# EAGLE board InstrDigitizer5 (EAGLE 8.5.2)
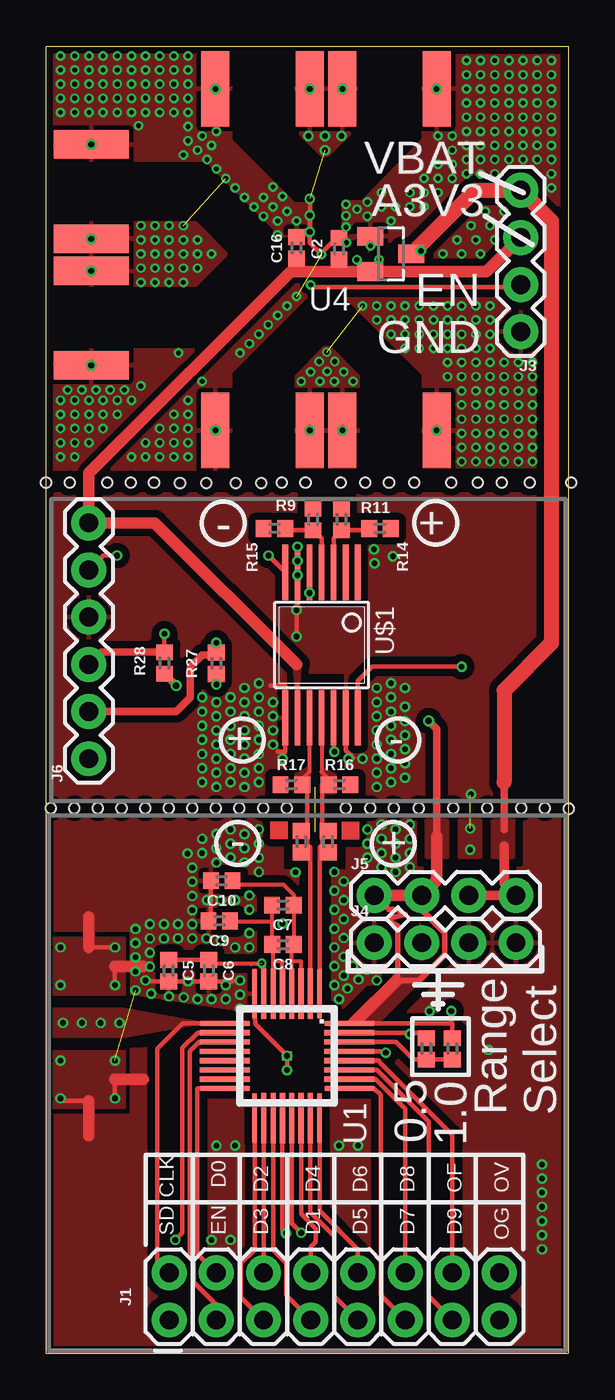
[diagram p0: board, top side]
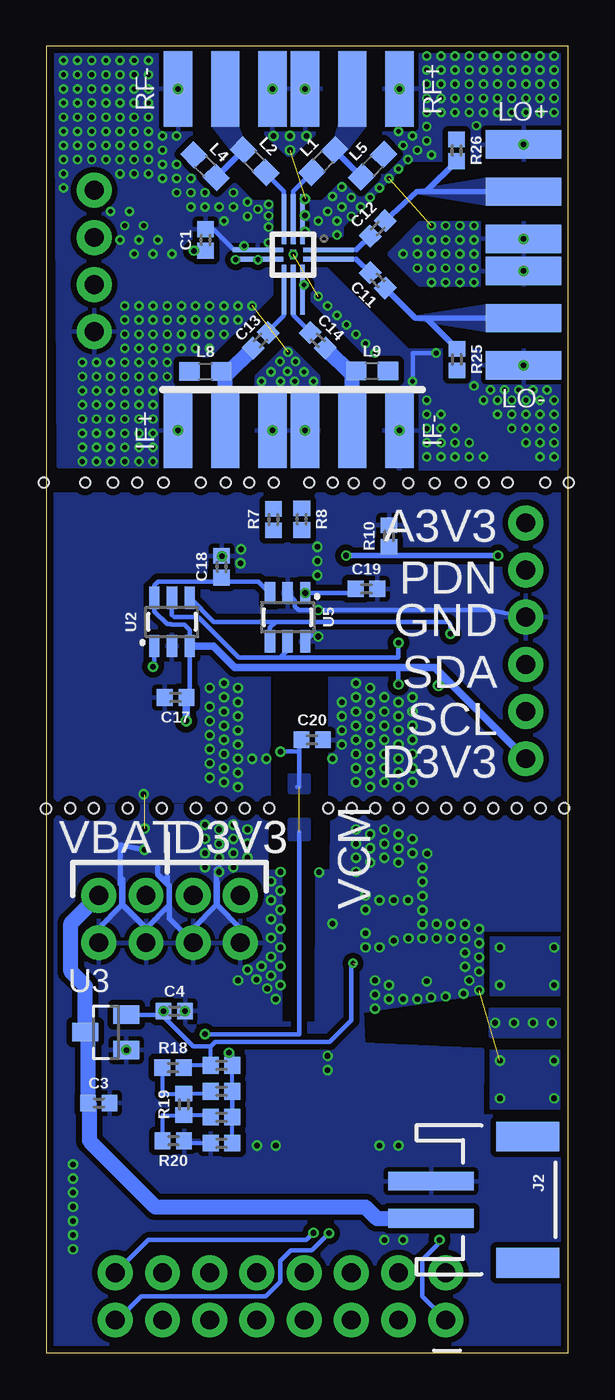
[diagram p1: board, bottom side, seen from below]

Size 28.09 x 70.36 mm. Coordinates in mm from the lower left corner, seen from the top.
Outline: 0,0 28.09,0 28.09,70.36 0,70.36 0,0
Copper layers (1*16): Top 0.0356mm / dielectric 60mil / Bottom 0.0356mm
Design rules "OSHPARK": minimum track width 6mil, minimum drill 10mil, track to track 6mil, track to pad 6mil, pad to pad 6mil, via to via 6mil, smd to smd 0mil, copper to edge 15mil, drill to drill 10mil, minimum pad ring 5mil, minimum via ring 5mil, stop-mask expansion 4mil, vias tented up to drill 20mil, thermal gap 10mil
Holes 0.55 mm at 16.1,29.34 18.69,29.34 12.93,29.34 11.66,29.34 10.39,29.34 9.12,29.34 26.82,29.34 7.85,29.34 6.58,29.34 5.31,29.34 25.55,29.34 23.72,29.34 21.89,29.34 20.04,29.34 28.12,29.31 8.61,46.84 17.42,29.34 4.04,29.34 2.77,29.34 1.5,29.34 0.23,29.34 15.85,46.86 18.44,46.86 13.94,46.86 11.56,46.84 10.19,46.84 5.79,46.86 4.55,46.86 3.28,46.86 24.51,46.86 23.22,46.86 21.79,46.86 19.79,46.86 26.01,46.86 17.17,46.86 7.19,46.84 1.24,46.86 -0.03,46.86 28.24,46.86 12.67,46.86

## Footprints (pad centres in the part's own frame; a part is rotated, then mirrored left to right if it is on the bottom)
0402 = smd 0.85 x 0.9: 1 -0.58,0; 2 0.58,0
CONSMA003.062 = smd 4.06 x 1.52: ANT 0,0; GND1 0,2.54; GND2 0,-2.54 | smd 4.06 x 1.52 bottom: GND3 0,2.54; GND4 0,-2.54
2X8 = drill 1.016 pad 1.88: 1 0,0; 2 0,2.54; 3 2.54,0; 4 2.54,2.54; 5 5.08,0; 6 5.08,2.54; 7 7.62,0; 8 7.62,2.54; 9 10.16,0; 10 10.16,2.54; 11 12.7,0; 12 12.7,2.54; 13 15.24,0; 14 15.24,2.54; 15 17.78,0; 16 17.78,2.54
JST-2-SMD = smd 1 x 4.6: 1 -1,-3.7; 2 1,-3.7 | smd 1.6 x 3.4: NC1 -3.4,1.5; NC2 3.4,1.5
1X04 = drill 1.016 pad 1.88: 1 0,0; 2 2.54,0; 3 5.08,0; 4 7.62,0
1X06 = drill 1.016 pad 1.88: 1 0,0; 2 2.54,0; 3 5.08,0; 4 7.62,0; 5 10.16,0; 6 12.7,0
0603 = smd 1.1 x 1: 1 -0.85,0; 2 0.85,0
HVQFN32_LONG = smd 2.7 x 0.28: 1 -3.35,1.75; 2 -3.35,1.25; 3 -3.35,0.75; 4 -3.35,0.25; 5 -3.35,-0.25; 6 -3.35,-0.75; 7 -3.35,-1.25; 8 -3.35,-1.75; 17 3.35,-1.75; 18 3.35,-1.25; 19 3.35,-0.75; 20 3.35,-0.25; 21 3.35,0.25; 22 3.35,0.75; 23 3.35,1.25; 24 3.35,1.75 | smd 0.28 x 2.7: 9 -1.75,-3.35; 10 -1.25,-3.35; 11 -0.75,-3.35; 12 -0.25,-3.35; 13 0.25,-3.35; 14 0.75,-3.35; 15 1.25,-3.35; 16 1.75,-3.35; 25 1.75,3.35; 26 1.25,3.35; 27 0.75,3.35; 28 0.25,3.35; 29 -0.25,3.35; 30 -0.75,3.35; 31 -1.25,3.35; 32 -1.75,3.35 | smd 0.5 x 0.5: EXP 0,0 | smd 0.25 x 0.25: M1 -2.415,2.415
SOT23-6 = smd 0.55 x 1.2: 1 0.95,1.3; 2 0,1.3; 3 -0.95,1.3; 4 -0.95,-1.3; 5 0,-1.3; 6 0.95,-1.3
SOT23 = smd 1 x 1.4: 1 -0.95,-1.1; 2 0.95,-1.1; 3 0,1.1
TSSOP14_LONG = smd 0.305 x 3: 1 -1.95,-3.918; 2 -1.3,-3.918; 3 -0.65,-3.918; 4 0,-3.918; 5 0.65,-3.918; 6 1.3,-3.918; 7 1.95,-3.918; 8 1.95,3.918; 9 1.3,3.918; 10 0.65,3.918; 11 0,3.918; 12 -0.65,3.918; 13 -1.3,3.918; 14 -1.95,3.918
QFN_10_2X2MM_05-08-1534_LONG = smd 0.25 x 2.7: P$1 -0.25,1.9; P$2 0.25,1.9; P$6 0.25,-1.9; P$7 -0.25,-1.9 | smd 2.7 x 0.25: P$3 1.9,0.5; P$4 1.9,0; P$5 1.9,-0.5; P$8 -1.9,-0.5; P$9 -1.9,0; P$10 -1.9,0.5 | smd 0.5 x 0.3: P$11 0,0

## Placement (x,y rotation side)
C1  1.0uF  [0402]  19.52,59.94 90 bottom
C2  1.0uF  [0402]  15.75,59.46 90 top
C3  1.0uF  [0402]  25.27,13.46 0 bottom
C4  1.0uF  [0402]  21.21,18.41 0 bottom
C5  1.0uF  [0402]  6.58,20.6 270 top
C6  1.0uF  [0402]  8.74,20.6 270 top
C7  1.0uF  [0402]  12.73,24.12 180 top
C8  1.0uF  [0402]  12.73,22 180 top
C9  1.0uF  [0402]  9.3,23.27 180 top
C10  1.0uF  [0402]  9.43,25.43 180 top
C11  1.0uF  [0402]  10.26,57.76 135 bottom
C12  1.0uF  [0402]  10.26,60.55 45 bottom
C13  1.0uF  [0402]  16.56,54.53 225 bottom
C14  1.0uF  [0402]  13.49,54.53 315 bottom
C16  1.0uF  [0402]  13.46,59.51 270 top
C17  1.0uF  [0402]  21.14,35.31 180 bottom
C18  0.1uF  [0402]  18.67,42.35 90 bottom
C19  1.0uF  [0402]  10.87,41.15 0 bottom
C20  1.0uF  [0402]  13.79,33.02 0 bottom
IF+  LINX-SMA-EDGE-0.062  [CONSMA003.062]  18.47,49.68 90 bottom
IF-  LINX-SMA-EDGE-0.062  [CONSMA003.062]  11.63,49.68 270 bottom
J1  [2X8]  6.6,1.78 0 top
J2  [JST-2-SMD]  3.68,8.26 270 bottom
J3  [1X04]  25.53,54.99 90 top
J4  [1X04]  17.65,22.1 0 top
J5  [1X04]  17.65,24.64 0 top
J6  [1X06]  2.29,32 90 top
L1  33nH/±5%/500mA  [0603]  13.19,64.19 45 bottom
L2  33nH/±5%/500mA  [0603]  16.89,64.17 135 bottom
L4  33nH/±5%/500mA  [0603]  19.56,63.91 315 bottom
L5  33nH/±5%/500mA  [0603]  10.54,63.93 225 bottom
L8  33nH/±5%/500mA  [0603]  19.53,52.86 0 bottom
L9  33nH/±5%/500mA  [0603]  10.57,52.88 0 bottom
LO+  LINX-SMA-EDGE-0.062  [CONSMA003.062]  2.41,62.53 0 bottom
LO-  LINX-SMA-EDGE-0.062  [CONSMA003.062]  2.41,55.73 180 bottom
R1  0  [0402]  18.67,15.49 180 bottom
R2  0  [0402]  18.67,14.1 180 bottom
R3  [0402]  15.16,27.53 270 top
R4  [0402]  13.72,27.53 90 top
R5  0  [0402]  18.67,12.7 180 bottom
R6  0  [0402]  18.67,11.3 180 bottom
R7  [0402]  15.88,44.88 270 bottom
R8  [0402]  14.35,44.9 270 bottom
R9  [0402]  14.35,44.89 90 top
R10  [0402]  9.65,44 90 bottom
R11  [0402]  15.88,44.89 90 top
R12  [0402]  21.84,16.38 90 top
R13  [0402]  20.45,16.38 270 top
R14  [0402]  17.96,44.4 0 top
R15  [0402]  12.27,44.4 180 top
R16  [0402]  15.77,30.61 0 top
R17  [0402]  13.18,30.61 0 top
R18  [0402]  21.28,15.37 0 bottom
R19  [0402]  20.7,13.39 90 bottom
R20  [0402]  21.26,11.43 180 bottom
R25  [0402]  5.99,53.5 90 bottom
R26  [0402]  6.02,64.77 270 bottom
R27  [0402]  9.14,37.14 90 top
R28  [0402]  6.35,37.16 270 top
RF+  LINX-SMA-EDGE-0.062  [CONSMA003.062]  11.63,68.07 270 bottom
RF-  LINX-SMA-EDGE-0.062  [CONSMA003.062]  18.47,68.07 90 bottom
U1  LTC2251HVQFN32_L  [HVQFN32_LONG]  12.95,16 270 top
U2  MCP4725  [SOT23-6]  21.34,39.37 180 bottom
U3  MCP1703CB  [SOT23]  24.89,17.27 90 bottom
U4  MCP1703CB  [SOT23]  18.54,59.18 270 top
U5  MCP4725  [SOT23-6]  15.11,39.62 0 bottom
U$1  THS7530TSSOP14_LONG  [TSSOP14_LONG]  14.81,38.13 180 top
U$3  LTC5562LONG  [QFN_10_2X2MM_05-08-1534_LONG]  14.81,59.16 270 bottom

## Library data of the parts
C1-C14 C16 C17 C19 C20 = SparkFun-Capacitors; PROD_ID: CAP-12417
C18 = SparkFun-Capacitors; PROD_ID: CAP-12416
IF+ IF- LO+ LO- RF+ RF- = connector; DIGIKEY: CONSMA003.062-ND
J1 = SparkFun-Connectors
J2 = SparkFun-Connectors; PROD_ID: CONN-11443; SF_ID: PRT-08612
J3-J5 = SparkFun-Connectors; PROD_ID: CONN-09696
J6 = SparkFun-Connectors; PROD_ID: CONN-08437
L1 L2 L4 L5 L8 L9 = SparkFun-Coils; PROD_ID: NDUC-07874
R1-R20 R25-R28 = SparkFun-Resistors
U1 U$1 U$3 = components
U2 U5 = SparkFun-IC-Conversion; PROD_ID: IC-08886
U3 U4 = linear

## Nets
A3V3: C2.1 C16.2 J3.3 J6.6 U4.2 U$1.9 U$3.P$6
A_PDN: J6.5 R10.1 U$1.7
AD_SNS: R12.1 R13.2 U1.30
ADC+: R3.1 R3.2 R16.1 U1.1 U$1.11
ADC-: R4.1 R4.2 R17.2 U1.2 U$1.10
ADC_MODE: R1.1 R2.1 R5.1 R6.1 U1.29
ADC_SHDN: J1.1 U1.10
AGND: C1.2 C2.2 C16.1 IF+.GND1 IF+.GND2 IF+.GND3 IF+.GND4 IF-.GND1 IF-.GND2 IF-.GND3 IF-.GND4 J3.1 LO+.GND1 LO+.GND2 LO+.GND3 LO+.GND4 LO-.GND1 LO-.GND2 LO-.GND3 LO-.GND4 RF+.GND1 RF+.GND2 RF+.GND3 RF+.GND4 RF-.GND1 RF-.GND2 RF-.GND3 RF-.GND4 U4.1 U$3.P$7 U$3.P$10 U$3.P$11
AMP+: R7.1 R11.2
AMP-: R8.1 R9.2
D0: J1.4 U1.16
D1: J1.5 U1.17
D2: J1.6 U1.18
D3: J1.7 U1.19
D3V3: C4.1 C5.1 C6.1 C17.1 C18.1 J5.1 J5.2 J6.1 R1.2 R12.2 R18.2 R27.1 R28.2 U1.7 U1.32 U2.3 U2.6 U3.2 U5.3
D4: J1.8 U1.22
D5: J1.9 U1.23
D6: J1.10 U1.24
D7: J1.11 U1.25
D8: J1.12 U1.26
D9: J1.13 U1.27
GND: C3.2 C4.2 C5.2 C6.2 C9.2 C10.2 C17.2 C18.2 C19.2 C20.2 J2.1 J4.1 J4.2 J4.3 J4.4 J6.4 R6.2 R10.2 R20.1 U1.8 U1.EXP U2.2 U3.1 U5.2 U5.6 U$1.6 U$1.8 U$1.13
IN+: L1.2 L5.2 RF+.ANT
IN-: L2.2 L4.2 RF-.ANT
LO+: C12.2 LO+.ANT R26.2
LO-: C11.1 LO-.ANT R25.2
MIX_EN: J3.2 U$3.P$3
N98: L1.1 U$3.P$9
N$1: R11.1 R14.1 U$1.3
N$11: R9.1 R15.1 U$1.4
N$20: C11.2 U$3.P$2
N$21: C7.1 C8.1 C10.1 U1.3 U1.4
N$22: R5.2 R19.1 R20.2
N$23: C7.2 C8.2 C9.1 U1.5 U1.6
N$24: C12.1 U$3.P$1
N$25: L2.1 U$3.P$8
N$26: C14.1 U$3.P$4
N$27: C13.1 U$3.P$5
N$30: R2.2 R18.1 R19.2
N$37: L8.1
N$38: L9.2
OEN: J1.3 U1.11
OF: J1.14 U1.28
OUT+: C13.2 IF+.ANT L8.2
OUT-: C14.2 IF-.ANT L9.1
OVDD: J1.16 U1.21
OVSS: J1.15 U1.20
SCL: J6.2 R27.2 U2.5 U5.5
SDA: J6.3 R28.1 U2.4 U5.4
SMP_CLK: J1.2 U1.9
VBAT: C1.1 C3.1 J2.2 J3.4 J5.3 J5.4 U3.3 U4.3
VC_CTRL: U2.1 U$1.14
VCM: C20.1 R13.1 U1.31 U$1.12
VGC: C19.1 U5.1 U$1.5

## Tracks (layer width: path | path; a pad name or v marks a point on that pad's centre or on a via)
A3V3  (via drill 0.25)
  Top 0.254: 13.51,35.97 13.51,35.9 U$1.9 | C16.2 13.15,58.61 13.15,58.23 | v17.91,58.88 17.44,58.41 | 17.44,58.41 U4.2 | v16.71,58.87 17.17,58.41 17.44,58.41 | 15.75,58.23 15.75,58.24 C2.1
  Top 0.61: J3.3 23.68,58.23 18.75,58.23 U4.2 15.75,58.23 13.15,58.23 2.29,47.37 J6.6 5.84,44.7 13.46,37.08
  Bottom 0.254: v16.71,58.87 U$3.P$6 17.88,58.91 v17.91,58.88
  pour Top (no thermals): 13.46,37.08 13.34,36.96 13.34,36.93 13.51,35.13 13.67,37.06
A_PDN  (via drill 0.3)
  Top 0.254: U$1.7 v11.96,42.94 | v3.79,42.94 3.06,42.94 J6.5
  Bottom 0.305: v11.96,42.94 9.65,42.94 | 9.65,42.94 v3.79,42.94 | R10.1 9.65,42.94
AD_SNS
  Top 0.254: U1.30 18.81,16.75 19.76,15.8 R13.2 R12.1
ADC+
  Top 0.203: U$1.11 14.81,31.29 15.24,30.86 | 15.24,28.19 R3.1
  Top 0.254: U1.1 14.7,27.26 R3.2 14.83,26.95 14.83,28.11 | R3.1 14.83,28.11 | 14.83,28.11 14.83,30.61 R16.1
  pour Top (no thermals): 14.81,30.23 15.52,30.23 15.52,31.11 14.81,31.5
ADC-
  Top 0.203: U$1.10 14.16,31.3 13.72,30.86
  Top 0.254: U1.2 14.2,27.25 R4.1 14.05,26.95 14.05,28.11 | R4.2 14.05,28.11 | R17.2 14.05,30.61 14.05,28.11
  pour Top (no thermals): 13.44,30.25 14.15,30.25 14.15,31.52 13.44,31.14
ADC_MODE  (via drill 0.3)
  Top 0.254: U1.29 18,16.25 v18.26,16.17
  Bottom 0.203: R2.1 R1.1 | R6.1 R5.1
  Bottom 0.254: v18.26,16.17 18.09,16.16 R1.1 | R2.1 R5.1
ADC_SHDN  (via drill 0.3)
  Top 0.254: v6.93,6.1 7.32,6.48 7.32,16.42 8.14,17.25 U1.10
  Bottom 0.254: v6.93,6.1 6.93,5.97 7.87,5.03 7.87,3.05 J1.1
AGND  (via drill 0.25, 0.3)  (4 unrouted)
  Top 0.203: v14.17,62.15 v14.17,61.27
  Top 0.254: IF-.GND3 9.4,49.38 | IF-.GND4 14.73,49.12 | v16.14,59.79 15.75,59.8 C2.2 15.59,60.04 14.76,59.21 | C16.1 13.75,60.38 v14.17,60.38 | v14.17,60.38 v14.17,61.27 | v14.17,60.38 14.17,59.79 14.76,59.21 | U$3.P$11 14.76,59.21 | U4.1 17.44,59.62 v17.45,59.61
  Bottom 0.203: U$3.P$10 14.17,61.06 v14.17,61.27
  Bottom 0.254: v8.38,52.32 8.38,53.85 v7.11,53.85 | U$3.P$7 16.15,59.41 v16.14,59.79 | C1.2 19.12,60.52 18.03,59.44 17.63,59.44 v17.45,59.61
  other vias: 1.52,48.26 0.76,48.26 2.29,49.02 2.29,49.78 2.29,50.55 1.52,50.55 1.52,49.78 1.52,49.02 0.76,50.55 0.76,49.78 0.76,49.02 4.57,48.26 1.14,51.87 1.91,51.87 3.81,50.55 3.05,50.55 3.05,49.78 2.29,51.31 1.52,51.31 0.76,51.31 5.33,48.26 6.1,48.26 6.86,48.26 2.41,53.19 9.09,49.68 2.67,51.87 3.43,51.87 4.19,51.87 4.57,51.31 3.81,51.31 3.05,51.31 6.1,49.78 6.86,50.55 6.86,49.78 6.86,49.02 6.1,49.02 5.33,49.02 7.62,48.26 5.08,52.07 7.62,49.02 7.62,49.78 7.62,50.55 7.62,51.31 10.41,53.85 10.92,54.36 11.43,54.86 11.94,55.37 12.45,55.88 2.41,58.27 2.41,59.99 6.6,57.66 7.37,57.66 7.37,58.42 6.6,58.42 5.84,57.66 5.84,58.42 5.08,57.66 5.08,58.42 9.65,63.25 7.37,60.71 8.13,58.42 5.84,59.94 5.08,59.94 7.37,59.94 6.6,59.94 7.37,59.18 6.6,59.18 5.84,59.18 5.08,59.18 6.6,60.71 5.84,60.71 5.08,60.71 2.41,65.07 8.89,59.18 8.13,59.18 8.13,59.94 4.95,66.09 2.29,68.33 2.29,67.56 2.29,66.8 1.52,68.33 1.52,67.56 1.52,66.8 0.76,68.33 0.76,67.56 0.76,66.8 14.17,49.68 14.68,53.39 15.11,52.86 14.22,52.83 14.73,52.32 13.72,52.32 15.93,49.68 21.01,49.68 17.02,56.39 15.09,53.9 15.52,53.39 16,52.83 16.51,52.32 15.49,52.32 22.35,48.01 14.99,64.77 14.81,59.16 13.46,56.9 12.95,56.39 24.64,48.01 23.88,48.01 23.11,48.01 22.35,49.53 22.35,48.77 22.35,51.05 22.35,50.29 7.37,64.52 4.57,68.33 4.57,67.56 4.57,66.8 3.81,68.33 3.81,67.56 3.81,66.8 3.05,68.33 3.05,67.56 3.05,66.8 2.29,69.85 2.29,69.09 1.52,69.85 1.52,69.09 0.76,69.85 0.76,69.09 12.45,60.2 12.45,60.96 11.68,61.21 9.14,63.75 13.46,60.96 19.3,54.1 18.54,54.86 19.3,54.86 17.78,55.63 18.54,55.63 19.3,55.63 21.59,52.58 21.59,53.34 20.07,55.63 20.07,54.86 20.07,54.1 26.16,48.01 25.4,48.01 24.64,49.53 24.64,48.77 23.88,49.53 23.88,48.77 23.11,49.53 23.11,48.77 24.64,51.05 24.64,50.29 23.88,51.05 23.88,50.29 23.11,51.05 23.11,50.29 22.35,53.34 22.35,52.58 22.35,51.82 12.19,62.79 6.86,68.33 6.86,67.56 6.86,66.8 6.1,68.33 6.1,67.56 6.1,66.8 5.33,68.33 5.33,67.56 5.33,66.8 4.57,69.85 4.57,69.09 3.81,69.85 3.81,69.09 3.05,69.85 3.05,69.09 7.62,66.04 9.14,65.79 8.38,65.53 8.89,65.02 8.13,64.77 8.64,64.26 11.18,61.72 10.16,62.74 10.67,62.23 11.68,62.23 12.19,61.72 7.62,65.28 17.78,56.39 18.54,56.39 19.3,56.39 22.35,55.63 21.59,55.63 20.83,55.63 20.07,56.39 22.35,54.86 22.35,54.1 21.59,54.86 21.59,54.1 20.83,54.86 20.83,54.1 26.16,49.53 26.16,48.77 25.4,49.53 25.4,48.77 26.16,51.05 26.16,50.29 25.4,51.05 25.4,50.29 24.64,53.34 24.64,52.58 24.64,51.82 23.88,53.34 23.88,52.58 23.88,51.82 23.11,53.34 23.11,52.58 23.11,51.82 16.13,61.24 16.13,60.63 17.27,61.21 12.7,62.28 6.86,69.85 6.86,69.09 6.1,69.85 6.1,69.09 5.33,69.85 5.33,69.09 7.62,68.33 7.62,67.56 7.62,66.8 12.95,61.47 9.09,68.07 14.99,65.53 23.88,55.63 23.11,55.63 22.35,56.39 21.59,56.39 20.83,56.39 23.88,54.86 23.88,54.1 23.11,54.86 23.11,54.1 26.16,53.34 26.16,52.58 26.16,51.82 25.4,53.34 25.4,52.58 25.4,51.82 16.71,61.59 16.13,61.85 17.27,61.98 18.54,60.96 7.62,69.85 7.62,69.09 14.1,65.53 22.35,59.18 22.1,59.94 21.34,59.18 23.88,56.39 23.11,56.39 18.03,62.48 18.03,61.72 18.8,61.72 19.56,61.72 19.56,62.48 14.17,68.07 15.88,65.53 24.13,59.94 23.37,59.18 23.88,60.71 23.11,59.94 22.86,60.71 20.32,61.72 20.32,62.48 20.32,63.25 21.84,63.25 21.08,63.25 21.08,62.48 22.61,63.5 15.93,68.07 24.64,61.47 23.62,61.47 21.84,65.53 21.84,64.77 21.84,64.01 21.08,65.53 21.08,64.01 24.13,63.5 23.37,63.5 22.61,65.79 22.61,65.02 22.61,64.26 27.18,62.74 27.18,63.5 24.89,65.79 24.89,65.02 24.89,64.26 24.13,65.79 24.13,65.02 24.13,64.26 23.37,65.79 23.37,65.02 23.37,64.26 22.61,68.83 22.61,68.07 22.61,67.31 22.61,66.55 21.01,68.07 27.18,65.79 27.18,65.02 27.18,64.26 26.42,65.79 26.42,65.02 26.42,64.26 25.65,65.79 25.65,65.02 25.65,64.26 24.89,68.83 24.89,68.07 24.89,67.31 24.89,66.55 24.13,68.83 24.13,68.07 24.13,67.31 24.13,66.55 23.37,68.83 23.37,68.07 23.37,67.31 23.37,66.55 22.61,69.6 27.18,68.83 27.18,68.07 27.18,67.31 27.18,66.55 26.42,68.83 26.42,68.07 26.42,67.31 26.42,66.55 25.65,68.83 25.65,68.07 25.65,67.31 25.65,66.55 24.89,69.6 24.13,69.6 23.37,69.6 27.18,69.6 26.42,69.6 25.65,69.6
  pour Bottom (isolate 0.305): 0.51,47.75 0.51,53.98 8.64,53.98 13.08,58.42 14.1,58.42 14.1,57.02 9.91,52.83 9.91,47.62 0.64,47.62
  pour Top (isolate 0.305): 0.38,53.98 0.38,47.62 9.91,47.62 9.91,52.83 13.97,56.9 13.97,58.04 12.32,58.04 8.26,53.98
  pour Bottom (isolate 0.305): 20.32,69.98 20.32,65.3 17.53,62.48 17.02,61.98 16,61.98 16,57.02 20.32,52.7 20.32,47.75 27.43,47.75 27.56,69.98
  pour Top (isolate 0.406): 20.32,69.98 20.32,65.33 17.02,61.98 16,61.98 16,57.02 20.32,52.7 20.32,47.75 27.56,47.75 27.56,69.98
  pour Top (isolate 0.305, rank 2): 13.46,47.75 16.76,47.75 16.76,52.58 15.24,54.1 14.99,54.1 13.46,52.58
  pour Bottom (isolate 0.305, rank 2): 16.76,47.75 13.46,47.75 13.46,52.58 14.99,54.1 15.24,54.1 16.76,52.58
  pour Bottom (isolate 0.406): 0.38,57.53 8,57.53 9.65,59.18 8,60.83 0.38,60.83
  pour Top (isolate 0.406): 0.38,60.83 8,60.83 9.65,59.18 8,57.53 0.38,57.53
  pour Bottom (isolate 0.406): 16.51,70.1 16.51,65.91 15.11,64.52 14.86,64.52 13.34,66.04 13.34,70.1
  pour Top (isolate 0.406): 13.46,70.1 13.46,65.91 14.86,64.52 15.11,64.52 16.64,66.04 16.64,70.1
  pour Bottom (isolate 0.305): 0.51,70.1 0.51,64.26 8.64,64.26 12.19,60.71 12.19,60.2 14.22,60.2 14.22,61.98 13.21,61.98 9.91,65.28 9.91,70.1
  pour Bottom (isolate 0.406): 0.51,70.1 0.51,64.26 8.64,64.26 12.19,60.71 12.19,60.2 14.22,60.2 14.22,61.98 13.21,61.98 9.91,65.28 9.91,70.1
  pour Top (isolate 0.305): 0.38,64.26 0.38,70.1 9.91,70.1 9.91,65.28 13.34,61.85 14.22,61.85 14.22,60.2 12.32,60.2 12.32,60.58 8.64,64.26
AMP+  (1 unrouted)
AMP-  (1 unrouted)
D0
  Top 0.254: U1.16 8.16,14.25 8.13,14.22 8.13,5.33 J1.4
D1
  Top 0.254: U1.17 11.2,5.56 10.46,4.82 10.46,3 J1.5
D2
  Top 0.254: U1.18 11.7,4.34 J1.6
D3
  Top 0.254: U1.19 12.2,7.59 12.2,5.53 12.9,4.82 12.9,3.1 J1.7
D3V3  (via drill 0.25, 0.3, 0.35)  (1 unrouted)
  Top 0.203: 11.7,20.66 11.41,20.96 11,20.96 11,20.95 8.74,20.95 C6.1 | R27.1 v9.14,36
  Top 0.254: C6.1 C5.1 | R12.2 21.84,17.75 | 21.84,17.75 16.76,17.75 U1.32 | 21.84,17.75 21.79,17.81 C4.1 | 11.68,19.37 U1.7 11.7,20.88 v11.59,20.99
  Top 0.305: 17.65,23.86 J5.1 18.41,23.88 18.8,23.88 19.3,23.62 18.29,23.37 18.9,23.01 18.9,20.35 U1.32 | J5.2 20.19,23.86 21.44,22.61 21.44,21.44 20.07,20.07 19.08,20.07 16.76,17.75
  Top 0.406: 21.01,27.81 21.01,33.6 v20.57,34.04 | R28.2 v6.99,35.94
  Top 0.61: 21.01,27.81 21.01,25.45 J5.2 J5.1
  Bottom 0.203: R18.2 20.7,15.49 R1.2 19.25,16.51 19.3,16.51
  Bottom 0.254: U5.3 16.69,41.55 18.67,41.55 | 18.67,41.55 22.08,41.55 22.29,41.34 U2.6 22.29,39.94 21.59,39.24 21.4,39.24 21.38,39.22 20.68,39.22 20.39,38.93 U2.3 20.39,35.48 C17.1 | v9.14,36 9.14,36.91 | U3.2 21.98,18.22 C4.1 21.79,18.11 20.19,16.51 19.3,16.51 | C18.1 18.67,41.55 | 19.25,16.51 19.01,16.75 12.84,16.75 11.68,17.91 11.68,20.9 v11.59,20.99
  Bottom 0.406: U2.3 19.11,38.07 17.96,36.91 9.14,36.91 7.19,36.91 6.6,36.32 | v20.57,34.04 20.57,35.29 C17.1 | 6.6,36.32 J6.1 | v6.99,35.94 6.6,36.32
  other vias: 21.79,18.41
  pour Top: 20.45,28.7 21.59,28.7 21.59,26.67 20.45,26.67
  pour Top (isolate 0.406, no thermals): 16.26,17.78 19.05,20.57 20.57,20.57 17.78,17.78
D4
  Top 0.254: U1.22 13.7,7.5 14.5,6.7 14.5,6 14.22,5.72 J1.8
D5
  Top 0.254: U1.23 14.2,7.57 15.49,6.29 15.49,3.06 J1.9
D6
  Top 0.254: U1.24 14.7,7.65 16.76,5.59 J1.10
D7
  Top 0.254: U1.25 17.62,14.25 17.98,13.89 17.98,3.1 J1.11
D8
  Top 0.254: J1.12 19.3,13.15 17.7,14.75 U1.26
D9
  Top 0.254: J1.13 20.57,3.05 20.57,12.45 17.77,15.25 U1.27
GND  (via drill 0.3)  (2 unrouted)
  Top 0.254: C10.2 8.85,23.27 C9.2 | 11.18,20.32 11.18,19.38 U1.8 11.2,18 11.23,17.97 11.23,17.72 U1.EXP v12.95,15.24 | v0.76,13.72 0.76,13.59 2.29,13.59 | v3.68,13.72 3.68,14.73 | v3.68,21.84 2.29,21.84 | v3.68,19.81 3.68,20.83 | 10.03,20.07 10.03,20.02 C6.2 v7.62,20.02 C5.2 5.33,20.02 v5.33,20.07 | U$1.6 13.51,40.05 v13.46,40.01 v13.46,38.59 | 12.45,32.38 12.86,32.38 U$1.8 12.86,35.94 12.06,35.94 | U$1.13 16.11,32.46 16.51,32.05 | 22.81,30.05 v22.86,30.1 | C4.2 20.57,18.47 20.57,18.54 | U3.1 23.73,16.26 23.62,16.26
  Top 0.61: 2.29,13.59 2.29,11.68 | 3.68,14.73 5.21,14.73 | 2.29,21.84 2.29,23.5 | 3.68,20.83 5.21,20.83
  Bottom 0.203: R6.2 20.56,11.3 R20.1
  Bottom 0.254: U5.2 14.72,40.53 14.72,40.21 14.51,40.01 v13.46,40.01 4.19,40.01 J6.4 | v13.46,38.59 13.65,38.84 U5.6
  Bottom 0.305: 24.13,25.65 23.98,25.5 23.98,24.12 22.73,22.88 | 24.13,25.65 24.13,27.36 v22.81,27.1 | J4.4 25.27,22.88 24.03,24.12 24.03,25.15 24.13,25.25 24.13,25.65 | J4.3 22.73,22.88 | 21.59,25.25 21.49,25.15 21.49,24.12 | 21.59,25.65 21.59,25.25 | 22.73,22.88 21.49,24.12 | 21.59,25.25 22.1,25.76 22.1,26.16 | 21.49,24.12 21.49,23.39 J4.2 20.19,22.88 18.95,24.12 18.95,25.4 | 18.8,26.16 18.95,26.01 18.95,25.4 | J4.1 17.65,22.88 18.9,24.12 18.9,25.35 18.95,25.4
  other vias: 0.76,21.84 0.76,19.81 0.76,15.75 3.68,15.75 22.81,28.24 12.95,16 20.63,18.41 23.79,16.32 15.49,25.91 15.49,24.89 15.49,23.88 15.49,22.86 15.49,21.84 16,22.35 15.49,20.83 16,25.4 16,24.38 16,23.37 16,21.34 15.49,19.81 16,20.32 15.75,19.05 16.21,19.63 17.27,28.19 17.27,27.43 11.43,27.43 11.43,28.19 13.41,25.88 11.43,25.91 11.43,26.67 12.7,23.11 10.92,23.88 10.92,24.64 10.16,24.38 9.4,24.38 8.64,24.38 10.67,26.42 10.67,27.18 10.67,27.94 18.03,27.69 18.03,28.45 10.92,22.61 10.92,21.84 10.16,21.84 10.41,20.07 10.41,19.3 9.65,19.81 9.65,19.05 10.41,18.54 8.89,19.05 8.13,19.05 7.39,19.15 6.6,19.2 5.64,19.35 4.8,19.53 4.8,20.55 5.56,20.8 4.8,21.31 5.56,21.56 4.8,22.07 5.56,22.33 4.8,22.83 6.32,22.33 7.09,22.33 7.85,22.33 8.61,22.33 9.4,22.2 5.56,23.09 6.32,23.09 7.09,23.09 7.85,23.09 16.51,20.83 16.79,20.12 17.78,20.07 17.27,20.65 11.43,30.73 11.43,31.5 11.43,32.26 12.7,32 12.19,32.77 11.43,33.02 17.78,30.48 17.78,31.24 17.78,32 17.02,32 16.26,32 17.78,32.77 18.54,33.02 18.54,32.26 18.54,31.5 18.54,30.73 19.3,30.99 19.3,31.75 19.3,32.51 17.27,26.67 18.03,26.92 18.03,26.16 18.8,28.19 18.8,27.43 18.8,26.67 18.8,25.91 19.56,28.45 19.56,27.69 19.56,26.92 19.56,26.16 10.67,30.48 10.67,31.24 10.67,32 10.67,32.77 9.91,30.73 9.91,31.5 9.91,32.26 9.91,33.02 19.3,33.27 9.91,33.78 10.67,33.53 9.91,34.54 10.67,34.29 9.91,35.31 10.67,35.05 10.67,35.81 11.43,35.31 11.43,34.54 11.43,33.78 12.19,33.53 12.19,34.29 12.19,35.05 17.78,33.53 18.54,33.78 19.3,34.04 19.3,34.8 18.54,34.54 17.78,34.29 17.78,35.05 18.54,35.31 19.3,35.81 18.54,36.07 17.78,35.81 13.51,43.41 13.51,42.65 13.51,41.88 17.63,43.28 17.65,42.52 18.64,42.9 9.91,28.19 9.91,27.43 9.91,26.67 9.14,27.94 9.14,27.18 9.14,26.42 8.38,27.69 8.38,26.92 9.14,30.48 9.14,31.24 9.14,32 9.14,32.77 9.14,33.53 9.14,34.29 9.14,35.05 11.43,36.07 8.38,30.73 8.38,31.5 8.38,32.26 8.38,33.02 8.38,33.78 8.38,34.54 8.38,35.31 7.85,23.85 7.85,24.61 7.85,25.37 7.85,26.14 7.59,26.9 26.67,10.16 26.67,9.4 26.67,8.64 26.67,7.87 26.67,7.11 26.67,6.35 26.67,5.59 8.89,6.1 9.91,6.1 9.14,11.18 10.16,11.18 15.75,11.18 16.76,11.18
  pour Top: 0.13,19.3 0.13,22.35 4.19,22.35 4.19,19.3
  pour Top (no thermals): 0.13,13.21 0.13,16.26 4.19,16.26 4.19,13.21
  pour Top: 22.23,28.7 23.37,28.7 23.37,26.67 22.23,26.67
  pour Top (isolate 0.406, rank 2): 0.25,29.84 12.7,29.82 12.7,25.98 13.54,25.98 13.46,18.41 15.42,18.39 15.42,25.98 16.18,25.98 16.18,29.84 21.59,29.84 21.59,26.29 24,26.29 24,29.84 27.69,29.84 27.69,0.38 0.25,0.38 0.25,12.83 4.57,12.83 4.57,16.38 10.92,16.64 10.92,14.1 14.99,14.1 14.99,17.91 11.3,17.91 11.28,18.31 4.6,19.33 4.57,22.73 0.25,22.73
  pour Bottom (isolate 0.305, rank 2): 17.14,29.46 27.69,29.46 27.69,0.38 0.38,0.38 0.33,12.73 0.3,12.78 4.65,12.75 4.62,16.33 11.05,16.61 11.13,18.41 4.67,19.41 4.65,22.78 0.25,22.81 0.25,29.46 12.7,29.41 12.7,28.91 12.73,25.93 13.51,25.93 13.54,17.73 15.52,17.78 15.49,25.91 16.26,25.91 16.26,28.96 17.14,28.96
  pour Top (isolate 0.406): 0.38,29.84 12.83,29.84 12.83,36.7 16.13,36.7 16.13,29.84 27.69,29.84 27.69,46.23 0.38,46.23
  pour Bottom (isolate 0.305): 0.38,46.23 0.38,29.84 12.83,29.84 12.83,36.83 16.13,36.83 16.13,29.72 27.69,29.72 27.69,46.23
  pour Bottom (isolate 0.406, no thermals): 0.43,16.28 4.22,16.28 4.22,13.18 0.43,13.18
  pour Bottom (isolate 0.406, no thermals): 0.43,22.38 4.22,22.38 4.22,19.28 0.43,19.28
IN+
  Bottom 0.305: L1.2 L5.2
  pour Bottom (isolate 0.406, no thermals): 11.43,66.67 10.92,66.17 10.92,66.07 11.91,64.82 12.55,65.48 12.32,66.17
IN-
  Bottom 0.305: L2.2 L4.2
  pour Bottom (isolate 0.406, no thermals): 18.54,66.8 19.18,66.07 18.19,64.82 17.53,65.46 17.88,66.34
LO+
  Bottom 0.305: C12.2 8.15,62.53 7.67,62.53 | 7.67,62.53 LO+.ANT | R26.2 7.67,62.53
  pour Bottom (isolate 0.305, no thermals): 3.43,62.61 3.96,63.14 4.45,63.14 8.15,62.53 4.45,61.93
LO-
  Bottom 0.305: C11.1 8.23,55.73 7.64,55.73 | 7.64,55.73 LO-.ANT | R25.2 7.64,55.73
  pour Bottom (isolate 0.305, no thermals): 3.43,55.88 3.89,56.34 4.42,56.34 8.23,55.73 4.42,55.12
MIX_EN  (via drill 0.25)
  Top 0.254: v14.22,57.52 14.34,57.4 25.4,57.4 J3.2
  Bottom 0.254: U$3.P$3 14.22,57.34 v14.22,57.52
N98
  Bottom 0.254: U$3.P$9 14.81,62.56 14.28,63.09 14.28,63.1 L1.1
N$1
  Top 0.254: U$1.3 15.46,43.89 R11.1 17.29,44.31 R14.1
N$11
  Top 0.254: U$1.4 14.81,43.85 R9.1 12.94,44.31 R15.1
N$20
  Bottom 0.254: U$3.P$2 11.41,58.91
  Bottom 0.305: 11.41,58.91 C11.2
N$21
  Top 0.203: C10.1 10.22,25.22 12.75,25.22 13.31,24.67 C7.1 13.31,22.1 | 13.31,22.1 C8.1 | U1.4 13.2,21.08 | 13.2,21.08 13.2,22.1 13.31,22.1 | U1.3 13.7,21.08 13.2,21.08
N$22
  Bottom 0.203: R20.2 21.84,12.81 R19.1 19.25,12.81 R5.2
N$23
  Top 0.203: 12.2,21.08 12.2,22 C8.2 12.15,23.24 | 12.15,23.24 C7.2 | C9.1 9.88,23.24 12.15,23.24 | U1.6 12.2,21.08 | U1.5 12.7,21.08 12.2,21.08
N$24
  Bottom 0.254: U$3.P$1 11.41,59.41
  Bottom 0.305: 11.41,59.41 C12.1
N$25
  Bottom 0.254: U$3.P$8 15.31,62.55 16.29,63.53 L2.1
N$26
  Bottom 0.254: U$3.P$4 14.81,55.88 14.17,55.24 C14.1
N$27
  Bottom 0.254: U$3.P$5 15.31,55.86 15.93,55.24 C13.1
N$30
  Bottom 0.203: 20.7,14.1 R19.2 | R18.1 21.86,13.97 R19.2 | R2.2 19.25,13.97 R19.2
OEN
  Top 0.254: J1.3 9.14,2.59 7.92,3.81 7.92,4.96 7.72,5.17 7.72,16.25 8.22,16.75 U1.11
OF
  Top 0.254: J1.14 21.84,11.76 17.94,15.66 17.93,15.67 17.85,15.75 U1.28
OUT+
  Bottom 0.254: 18.47,52.63 18.47,52.58
  Bottom 0.406: 18.47,52.58 18.47,52.86 L8.2 18.38,53.16
  Bottom 0.813: IF+.ANT 18.47,52.58 | C13.2 18.47,52.63
OUT-
  Bottom 0.254: 11.63,52.68 11.63,52.67
  Bottom 0.406: 11.63,52.67 L9.1 11.72,53.19
  Bottom 0.813: IF-.ANT 11.63,52.67 | C14.2 11.63,52.68
OVDD  (via drill 0.3)
  Top 0.254: U1.21 13.2,6.99 v13.72,6.48
  Bottom 0.254: v13.72,6.48 14.1,6.1 22.61,6.1 J1.16
OVSS  (via drill 0.3)
  Top 0.254: U1.20 12.7,6.63 v12.89,6.45
  Bottom 0.254: J1.15 24.26,1.78 22.99,3.05 16.29,3.05 15.49,3.85 15.49,4.98 14.94,5.54 13.8,5.54 v12.89,6.45
SCL  (via drill 0.3)
  Top 0.254: R27.2 v9.14,38.25
  Top 0.406: R27.2 9.02,37.59 8.38,37.59 7.75,36.96 7.75,35.31 6.99,34.54 J6.2
  Bottom 0.254: U5.5 15.11,37.85 15.49,37.47 | 15.49,37.47 15.65,37.47 15.67,37.44 17.73,37.44 19.91,39.62 21.21,39.62 21.34,39.75 U2.5 | 15.49,37.47 14.57,37.47 14.55,37.44 9.14,37.44 v9.14,38.25
SDA  (via drill 0.3)
  Top 0.254: R28.1 v6.35,38.73
  Top 0.406: R28.1 2.94,37.74 J6.3
  Bottom 0.254: 15.75,39.37 6.48,39.37 6.35,39.24 v6.35,38.73 | U5.4 16.06,39.05 15.75,39.37 | 15.75,39.37 19.09,39.37 U2.4
SMP_CLK  (via drill 0.3)
  Top 0.254: U1.9 7.34,17.75 5.97,16.38 5.97,4.95 J1.2
  other vias: 0.89,17.78 1.91,17.78 2.92,17.78 3.94,17.78
  pour Top (no thermals): 0.13,18.54 4.19,18.54 8.38,17.78 4.19,17.02 0.13,17.02
  pour Bottom (no thermals): 4.19,18.54 0.13,18.54 0.13,17.02 4.19,17.02
VBAT  (via drill 0.3)
  Top 0.254: v20.16,59.36 21.31,60.85
  Top 0.406: 24.64,30.73 24.64,28.19
  Top 0.508: 24.64,27.3 24.64,25.27 J5.4 J5.3
  Top 0.813: U4.3 21.31,60.85 23.07,62.61 J3.4 27.18,60.96 27.18,38.23 24.64,35.69 24.64,30.73
  Bottom 0.254: C1.1 v20.16,59.36
  Bottom 0.813: J5.4 26.77,23.14 26.77,20.55 25.99,19.77 U3.3 25.85,17.13 C3.1 25.78,13.39 25.78,11.43 22.23,7.87 10.92,7.87 10.3,7.25 J2.2
  pour Top: 24,28.7 25.15,28.7 25.15,26.67 24,26.67
VC_CTRL  (via drill 0.3)
  Top 0.254: v22.35,36.96 17.53,36.96 16.76,36.19 U$1.14
  Bottom 0.254: U2.1 22.29,37.02 v22.35,36.96
VCM  (via drill 0.3)  (1 unrouted)
  Top 0.254: U1.31 19.48,17.25 | 19.48,17.25 20.45,17.25 R13.1 | U$1.12 15.46,32.42 v15.49,32.38 | v19.56,17.17 19.48,17.25
  Bottom 0.254: v15.49,32.38 14.48,32.38 | v19.56,17.17 14.48,17.17 14.48,28.07 | 14.48,32.38 14.48,30.48 14.61,30.48 | C20.1 14.48,32.91 14.48,32.38
  pour Bottom: 13.97,27.69 14.99,27.69 14.99,28.7 13.97,28.7
  pour Bottom: 13.97,30.23 14.99,30.23 14.99,31.11 13.97,31.11
VGC  (via drill 0.3)
  Top 0.203: U$1.5 U5.1
  Bottom 0.254: C19.1 11.67,40.92 U5.1
  other vias: 14.16,40.92
(copper drawn outside any net)
  shapes: Top area x2

## Text on the board
tPlace: VBAT | A3V3 | EN | GND | - | + | + | - | - | + | Range / Select | 0.5 | 1.0 | D0 | D2 | D4 | D6 | D8 | OF | OV | CLK | SD | EN | D3 | D1 | D5 | D7 | D9 | OG
bPlace: A3V3 | PDN | GND | SDA | SCL | D3V3 | VCM | D3V3 | VBAT